# EAGLE board Balloon2_ (EAGLE 7.3.0)
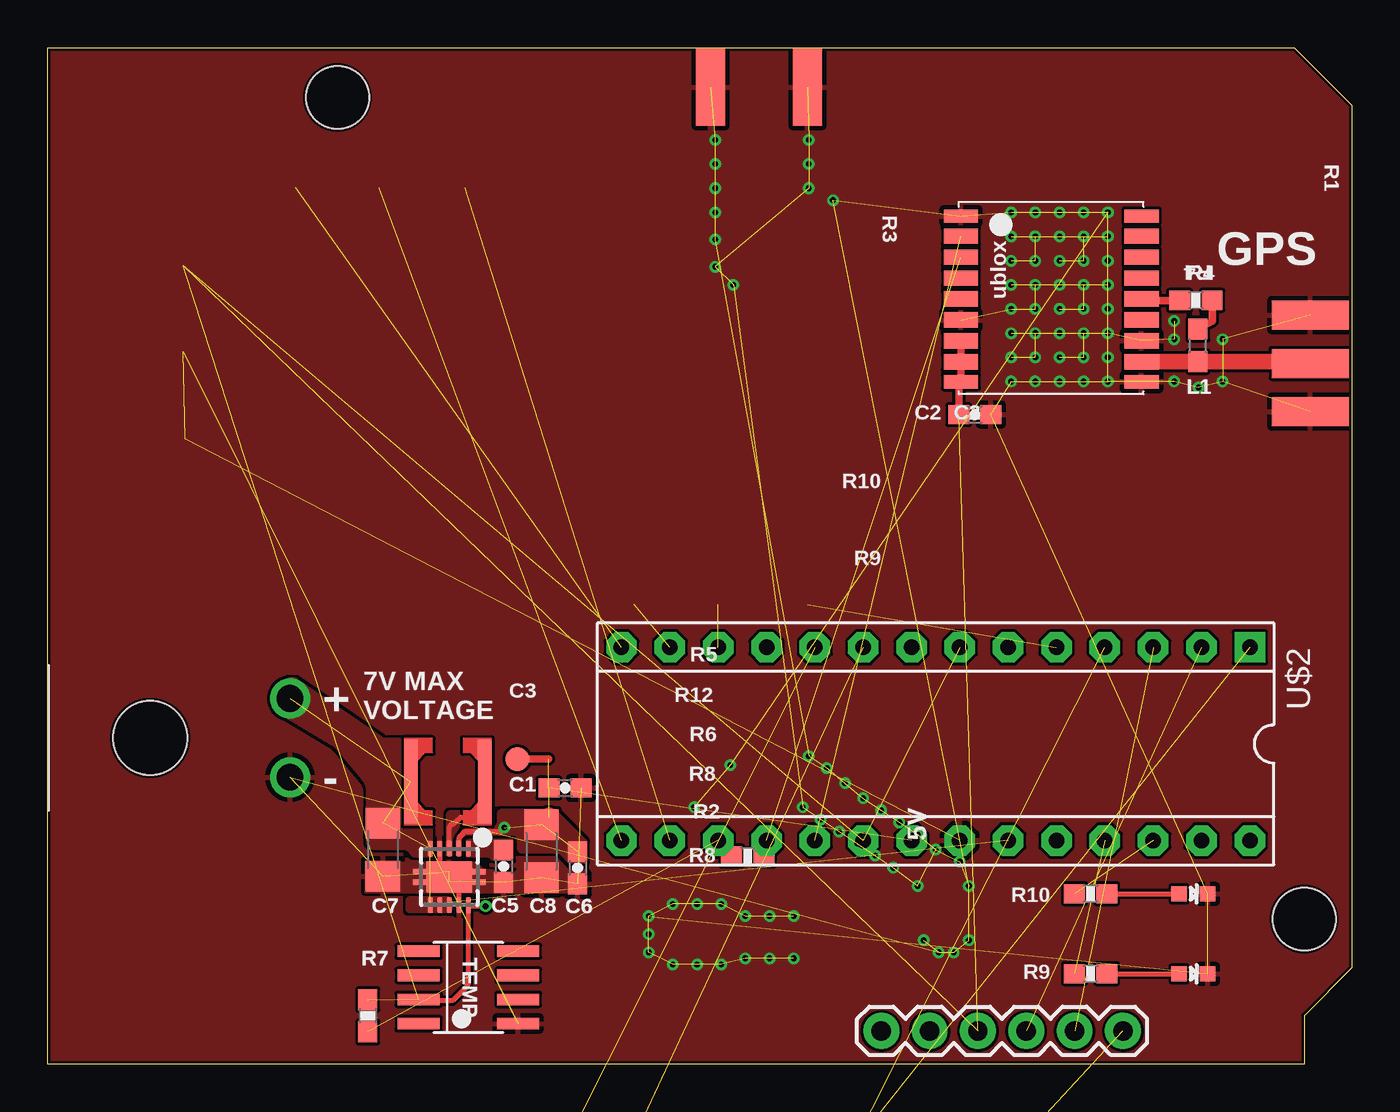
[diagram p0: board, top side]
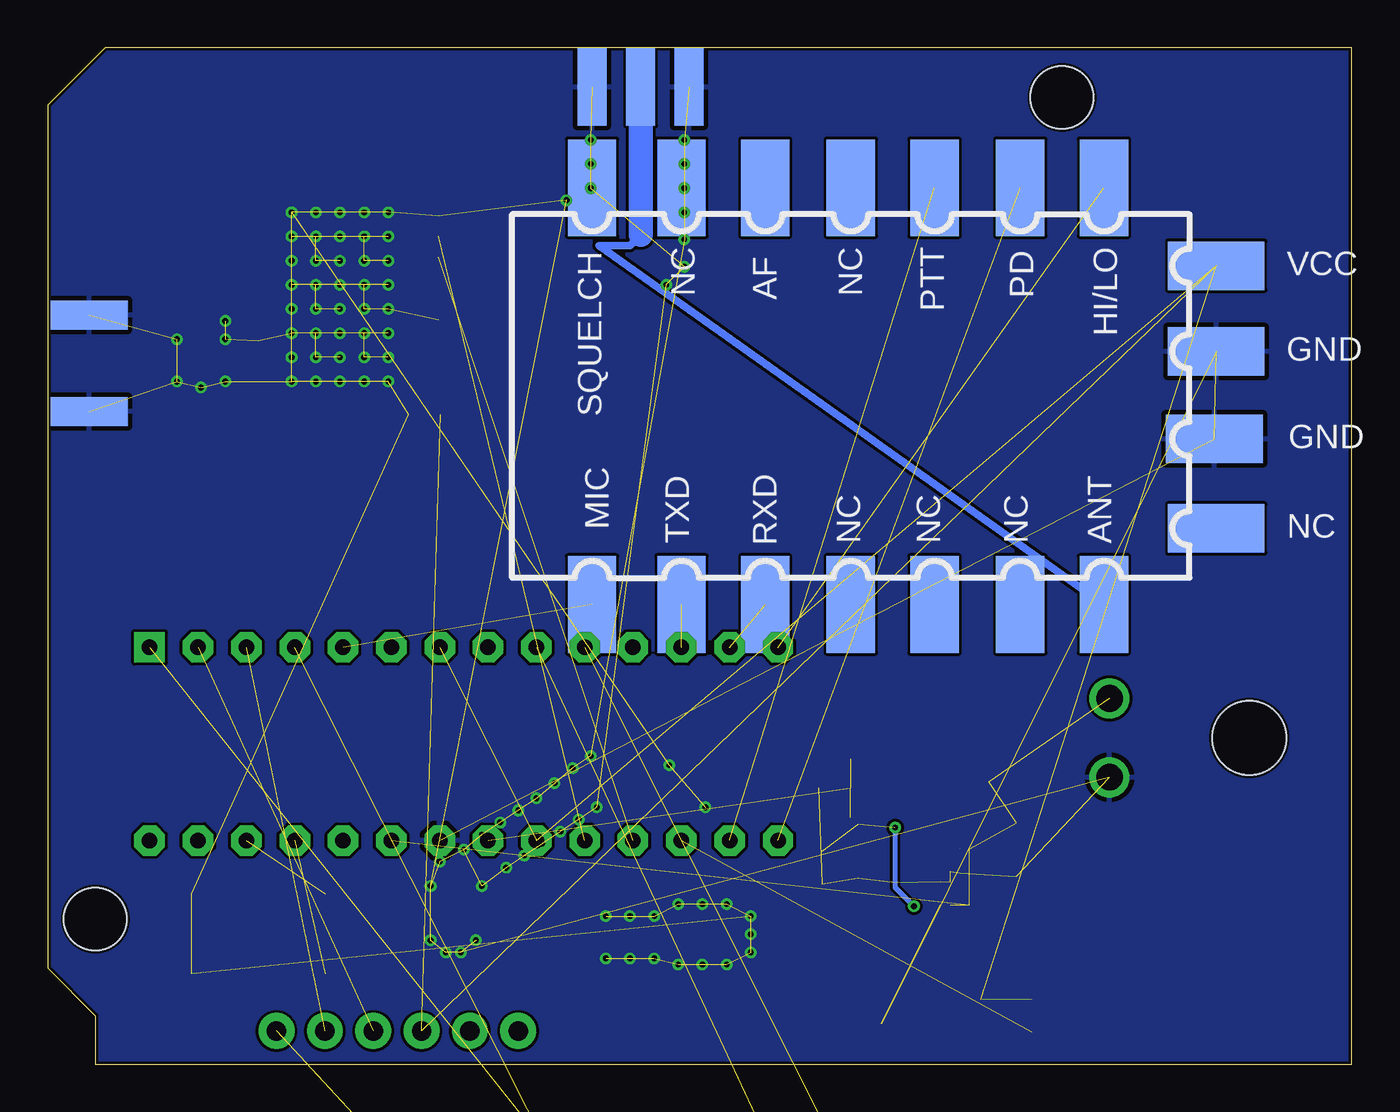
[diagram p1: board, bottom side, seen from below]

Size 68.55 x 53.43 mm. Coordinates in mm from the lower left corner, seen from the top.
Outline: 0,53.43 65.52,53.43 68.55,50.4 68.55,5.05 68.53,5.05 66.04,2.54 66.04,0 0,0 0,53.43
Copper layers (1*16): Top 0.035mm / dielectric 1.5mm / Bottom 0.035mm
Design rules "Hackvana": minimum track width 6mil, minimum drill 0.3mm, track to track 6mil, track to pad 6mil, pad to pad 6mil, via to via 6mil, smd to smd 0mil, copper to edge 6mil, drill to drill 6mil, minimum pad ring 10mil, minimum via ring 6mil, stop-mask expansion 2mil, vias tented up to drill 100mil, thermal gap 10mil
Net classes: 0 default: width 0.203 mm; 1 vcc: width 0.254 mm; 2 gnd: width 0.305 mm, drill 0.508 mm, clearance 0.152 mm
Holes 3.3 mm at 66.04,7.62 15.24,50.8

## Footprints (pad centres in the part's own frame; a part is rotated, then mirrored left to right if it is on the bottom)
0603-CAP = smd 1.1 x 1: 1 -0.85,0; 2 0.85,0
1206 = smd 1.6 x 1.8: 1 -1.4,0; 2 1.4,0
1X06 = drill 1.016 pad 1.88: 1 0,0; 2 2.54,0; 3 5.08,0; 4 7.62,0; 5 10.16,0; 6 12.7,0
S-PDSO-N10 = smd 0.28 x 0.85: 1 -1,-1.475; 2 -0.5,-1.475; 3 0,-1.475; 4 0.5,-1.475; 5 1,-1.475; 6 1,1.475; 7 0.5,1.475; 8 0,1.475; 9 -0.5,1.475; 10 -1,1.475 | smd 2.4 x 1.65: PP 0,0 | smd 3.8 x 0.28: PP@1 0,0.275; PP@2 0,-0.275
SMA-EDGE = smd 1.524 x 4.064: GND@0 -2.54,0; GND@1 2.54,0; SIG 0,0 | smd 1.524 x 4.064 bottom: GND@2 -2.54,0; GND@3 2.54,0
0603 = smd 1.1 x 1: 1 -0.85,0; 2 0.85,0
LED-0603 = smd 0.8 x 0.8: A 0,-0.75; C 0,0.75
COILCRAFT_LPS4018 = smd 0.7 x 4.4: P$1 -1.95,0; P$2 1.95,0
QS = drill 0.61 long: 1 -2.54,0; 2 2.54,0
0603-RES = smd 1.1 x 1: 1 -0.85,0; 2 0.85,0
BUZZER-12MM-NS = drill 0.9: + 3.25,0; - -3.25,0
DS18B20_SOIC = smd 0.61 x 2.21: DQ 1.905,-2.616; GND 1.905,2.616; NC -1.905,-2.616; NC2 -0.635,-2.616; NC3 -1.905,2.616; NC4 -0.635,2.616; NC5 0.635,2.616; VCC 0.635,-2.616
PAD.03X.05 = smd 1.27 x 1.27: P$1 0,0
UBLOX_MAX = smd 1.8 x 0.7: 1_GND 4.95,-4.4; 9_V_RESET 4.95,4.3; 10_GND -4.55,4.3; 18_RESERVED -4.55,-4.4 | smd 1.8 x 0.8: 2_TXD1 4.95,-3.35; 3_RXD1 4.95,-2.25; 4_TIMEPULSE 4.95,-1.15; 5_EXTINT0 4.95,-0.05; 6_V_BCKP 4.95,1.05; 7_VCC_IO 4.95,2.15; 8_VCC 4.95,3.25; 11_RF_IN -4.55,3.25; 12_GND -4.55,2.15; 13_ANTON -4.55,1.05; 14_VCC_RF -4.55,-0.05; 15_RESERVED -4.55,-1.15; 16_SDA2 -4.55,-2.25; 17_SCL2 -4.55,-3.35
DIL28 = drill 0.813 pad 1.6 square: 1 -16.51,-5.08 | drill 0.813 pad 1.6 octagon: 2 -13.97,-5.08; 3 -11.43,-5.08; 4 -8.89,-5.08; 5 -6.35,-5.08; 6 -3.81,-5.08; 7 -1.27,-5.08; 8 1.27,-5.08; 9 3.81,-5.08; 10 6.35,-5.08; 11 8.89,-5.08; 12 11.43,-5.08; 13 13.97,-5.08; 14 16.51,-5.08; 15 16.51,5.08; 16 13.97,5.08; 17 11.43,5.08; 18 8.89,5.08; 19 6.35,5.08; 20 3.81,5.08; 21 1.27,5.08; 22 -1.27,5.08; 23 -3.81,5.08; 24 -6.35,5.08; 25 -8.89,5.08; 26 -11.43,5.08; 27 -13.97,5.08; 28 -16.51,5.08
DORJI = smd 2.54 x 5.08: P$1 4.2,20.5; P$2 8.9,20.5; P$3 13.3,20.5; P$4 17.8,20.5; P$5 22.2,20.5; P$6 26.7,20.5; P$7 31.1,20.5; P$12 31.1,-1.4; P$13 26.7,-1.4; P$14 22.2,-1.4; P$15 17.8,-1.4; P$16 13.3,-1.4; P$17 8.9,-1.4; P$18 4.2,-1.4 | smd 5.08 x 2.54: P$8 37,16.4; P$9 37,11.9; P$10 36.9,7.3; P$11 37,2.6
TE_CONNECTIVITY_1-770966-0 = drill 1.4: P$1 -2.07,7.34; P$2 2.07,7.34 | hole 3.9: 0,0

## Placement (x,y rotation side)
C1  100nF  [0603-CAP]  27.19,14.51 0 top
C2  100n  [0603-CAP]  48.74,34.13 0 top
C4  1u  [0603-CAP]  0.32,-58.26 0 top  (outside the outline)
C5  10µF  [0603-CAP]  23.97,10.4 270 top
C6  0.1µF  [0603-CAP]  27.86,10.32 270 top
C7  10uF  [1206]  17.62,11.27 270 top
C8  22uF  [1206]  25.96,11.19 270 top
C9  22p  [0603-CAP]  0.32,-61.28 0 top  (outside the outline)
C10  22p  [0603-CAP]  0.32,-64.29 0 top  (outside the outline)
FTDI  [1X06]  56.52,1.75 180 top
IC2  TPS61201  [S-PDSO-N10]  21.11,9.84 180 top
J$2  SMA_EDGE  [SMA-EDGE]  66.36,36.83 90 top
J$4  SMA_EDGE  [SMA-EDGE]  37.39,51.36 0 bottom
L1  33µH  [0603]  60.45,37.77 90 top
LED1  Green  [LED-0603]  60.21,4.75 270 top
LED3  Red  [LED-0603]  60.21,8.95 270 top
LPS4018  2.2µH  [COILCRAFT_LPS4018]  21.03,14.84 0 top
Q1  [QS]  4.6,-54.45 0 top  (outside the outline)
R4  10R  [0603-RES]  60.35,40.14 180 top
R7  4K7  [0603-RES]  16.83,2.54 270 top
R8  10k  [0603-RES]  36.8,10.94 0 top
R9  1k  [0603-RES]  54.82,4.75 180 top
R10  1k  [0603-RES]  54.82,8.95 180 top
SG1  BUZZERNS  [BUZZER-12MM-NS]  4.92,-72.07 0 top  (outside the outline)
TEMP  DS1821  [DS18B20_SOIC]  22.11,4.03 270 top
TP1  TEST-POINT3X5  [PAD.03X.05]  24.69,16.03 0 top
U$1  UBLOX_MAX  [UBLOX_MAX]  52.94,40.16 180 top
U$2  ATMEGA328  [DIL28]  46.67,16.83 180 top
U$7  [DORJI]  44.13,25.56 0 bottom
U$9  TE_CONNECTIVITY_1-770966-0  [TE_CONNECTIVITY_1-770966-0]  5.4,17.14 270 top

## Library data of the parts
C1 C2 C4-C10 FTDI J$2 J$4 L1 LED1 LED3 R4 R7-R10 TP1 = SparkFun
IC2 = texas; MPN: TPS61201DRCT; OC_FARNELL: unknown; OC_NEWARK: 37M0068
LPS4018 = StevesCoilCraft; FARNELL: 2287680
Q1 = special
SG1 = SparkFun-Electromechanical
TEMP U$1 = ava
U$2 = ido
U$7 = dorji
U$9 = ava; FARNELL: 1098556

## Nets
A0/VBATT [vcc]: C7.1 IC2.5 IC2.6 IC2.7 IC2.8 LPS4018.P$1 U$2.23 U$9.P$1
BUZZER: SG1.+ U$2.4
D4: U$2.6
GND [vcc]: C1.2 C2.2 C5.2 C6.2 C7.2 C8.2 IC2.4 IC2.9 IC2.PP IC2.PP@1 IC2.PP@2 J$2.GND@0 J$2.GND@1 J$2.GND@2 J$2.GND@3 J$4.GND@0 J$4.GND@1 J$4.GND@2 J$4.GND@3 LED1.C LED3.C TEMP.GND U$1.1_GND U$1.6_V_BCKP U$1.10_GND U$1.12_GND U$2.22 U$7.P$9 U$7.P$10 U$9.P$2
JETTISON: U$2.11
N$1: U$2.5 U$7.P$18
N$2: C4.2 FTDI.1
N$3: C4.1 U$2.1
N$4: J$2.SIG L1.1 U$1.11_RF_IN
N$5: IC2.3 LPS4018.P$2
N$6: J$4.SIG U$7.P$12
N$8: FTDI.6
N$9: FTDI.3 U$2.2
N$10: FTDI.2 U$2.3
N$11: C5.1 IC2.1
N$12: LED1.A R9.1
N$13: LED3.A R10.1
N$14: L1.2 R4.1
N$15: R4.2 U$1.14_VCC_RF
N$16: U$2.8
N$17: C9.1 Q1.2 U$2.9
N$18: C10.1 Q1.1 U$2.10
N$19: C10.2
N$20: U$1.3_RXD1 U$2.18
N$21: U$2.12 U$7.P$17
N$22: U$2.13 U$7.P$16
N$23: U$2.14 U$7.P$7
N$24: U$2.15 U$7.P$6
N$25: U$2.16 U$7.P$5
N$26: R7.2 U$2.17
N$28: C1.1 U$2.21
N$29: U$1.2_TXD1 U$2.19
N$30: R10.2 U$2.26
N$31: R9.2 U$2.25
N$33: SG1.-
SCL: U$2.28
SDA: U$2.27
V5V: C6.1 C8.1 IC2.2 IC2.10 TP1.P$1
VCC: C2.1 FTDI.4 R7.1 TEMP.VCC U$1.7_VCC_IO U$1.8_VCC U$1.9_V_RESET U$2.7 U$2.20 U$7.P$8

## Tracks (layer width: path | path; a pad name or v marks a point on that pad's centre or on a via)
A0/VBATT  (7 unrouted)
  pour Top (no thermals): 19.06,8.81 21.02,8.81 arc-90 21.27,8.56 21.27,8.19 arc-90 21.02,7.94 19.06,7.94 arc-90 18.81,8.19 18.81,8.56 arc-90
  pour Top (no thermals): 15.19,16.54 16.51,14.96 arc-40 16.75,14.32 16.75,11.69 arc45 16.82,11.52 16.99,11.34 arc45 17.17,11.27 18.71,11.27 arc-45 18.89,11.2 19.14,10.95 arc45 19.31,10.87 20.24,10.87 20.24,13.26 20.16,13.34 19.76,13.34 19.37,13.73 19.37,16.03 19.76,16.43 20.24,16.43 20.24,17.14 17.72,17.14 arc-45 17.55,17.22 13.08,20.28 arc34 12.94,20.32 12.7,20.32 11.99,19.92 11.91,18.57 14.94,16.75 arc-19
BUZZER  (1 unrouted)
GND  (via drill 0.3)  (126 unrouted)
  Top 0.254: 20.6,11.31 20.6,10.04 | 21.63,8.37 21.63,9.6
  other vias: 33.97,13.49 35.88,15.72 41.27,45.4 48.42,9.37 45.72,9.37 46.04,6.51 48.42,6.51 47.62,5.87 46.83,5.87 44.45,10.32 47.94,10.64 46.67,11.27 43.5,10.95 45.72,12.06 44.77,12.7 43.81,13.34 42.86,13.97 41.91,14.76 42.55,11.59 41.59,12.22 40.64,12.86 39.69,13.49 36.04,40.96 35.08,41.91 40.01,46.04 40.01,47.31 40.01,48.58 40.96,15.56 40.01,16.19 35.08,43.34 35.08,44.77 35.08,46.04 35.08,47.31 35.08,48.58 39.21,7.78 37.94,7.78 36.67,7.78 35.4,8.41 34.13,8.41 32.86,8.41 31.59,7.78 31.59,5.87 32.86,5.24 34.13,5.24 35.4,5.24 39.21,5.56 37.94,5.56 36.67,5.56 31.59,6.83 55.72,43.5 61.75,38.1 61.75,35.88 59.21,38.1 59.21,39.05 59.21,35.88 60.48,35.56 55.72,35.88 55.72,37.15 55.72,38.42 55.72,39.69 55.72,40.96 55.72,42.23 55.72,44.77 54.45,43.5 54.45,35.88 54.45,37.15 54.45,38.42 54.45,39.69 54.45,40.96 54.45,42.23 54.45,44.77 53.18,43.5 53.18,35.88 53.18,37.15 53.18,38.42 53.18,39.69 53.18,40.96 53.18,42.23 53.18,44.77 51.91,43.5 51.91,35.88 51.91,37.15 51.91,38.42 51.91,39.69 51.91,40.96 51.91,42.23 51.91,44.77 50.64,43.5 50.64,35.88 50.64,37.15 50.64,38.42 50.64,39.69 50.64,40.96 50.64,42.23 50.64,44.77
  pour Top (no thermals): 28.34,10.24 27.38,10.24 26.82,10.8 arc45 26.65,10.91 24.94,10.91 arc90 24.69,10.62 24.69,10.33 arc-90 24.44,10.08 23.2,10.08 arc-45 23.02,10.15 22.54,10.64 20.08,10.64 20,10.56 20,9.05 19.92,8.97 28.34,8.97
  pour Top (no thermals): 16.67,10.64 20,10.64 20,8.97 16.67,8.97
  pour Top (rank 2): 0,53.43 65.52,53.43 68.55,50.4 68.58,5.08 66.04,2.54 66.04,0 0,0
  pour Bottom: 0,53.43 65.52,53.43 68.55,50.4 68.58,5.08 66.04,2.54 66.04,0 0,0
N$1  (1 unrouted)
N$2  (1 unrouted)
N$3  (1 unrouted)
N$4
  Top 0.254: L1.1 61.08,36.91
  Top 0.813: U$1.11_RF_IN 61.08,36.91 | L1.1 66.26,36.92 J$2.SIG
N$5
  Top 0.254: IC2.3 21.11,12.4 arc-45 21.19,12.57 21.23,12.62 21.25,12.62 arc45 21.43,12.69 21.71,12.98 22.64,12.98 arc45 22.81,13.05 22.98,13.22 LPS4018.P$2 arc-45 LPS4018.P$2
  pour Top (no thermals): 21.27,10.95 20.95,10.95 20.95,13.09 arc-90 21.2,13.34 22.23,13.34 22.23,12.54 21.85,12.54 arc59 21.64,12.42 21.27,11.83
N$6
  Bottom 0.406: 37.39,43.58 37.94,43.02 39.57,43.02 U$7.P$12
  Bottom 1.27: J$4.SIG 37.39,43.58
N$9  (1 unrouted)
N$10  (1 unrouted)
N$11
  pour Top (no thermals): 21.99,10.87 23.07,10.87 arc-45 23.25,10.8 23.34,10.72 24.45,10.72 24.45,11.83 22.17,11.83 arc45 21.99,11.75 arc45 21.99,11.74
N$12
  Top 0.254: 59.16,4.96 LED1.A R9.1
N$13
  Top 0.254: 59.16,9.17 LED3.A R10.1
N$14
  Top 0.406: R4.1 61.2,39.05 L1.2
N$15
  Top 0.406: R4.2 57.57,40.14 U$1.14_VCC_RF
N$17  (2 unrouted)
N$18  (2 unrouted)
N$20  (1 unrouted)
N$21  (1 unrouted)
N$22  (1 unrouted)
N$23  (1 unrouted)
N$24  (1 unrouted)
N$25  (1 unrouted)
N$26  (1 unrouted)
N$28  (1 unrouted)
N$29  (1 unrouted)
N$30  (1 unrouted)
N$31  (1 unrouted)
V5V  (via drill 0.3)  (3 unrouted)
  Top 0.254: IC2.2 21.61,11.79 arc-45 21.69,11.96 21.95,12.22 23.83,12.22 arc45 24,12.3 v24.01,12.42 | v23.02,8.29 22.11,8.29 | 22.11,8.29 IC2.10 | 22.11,8.29 22.11,4.27 arc-45 22.03,4.09 21.27,3.33 19.65,3.33
  Top 0.406: TP1.P$1 26.34,16.03
  Top 1.016: 26.34,12.98 C8.1
  Bottom 0.254: v24.01,12.42 24.01,9.29 v23.02,8.29
  pour Top (no thermals): 21.47,10.95 21.47,11.75 arc-33 21.51,11.89 21.75,12.27 arc-57 21.96,12.38 23.3,12.38 arc50 23.49,12.47 23.56,12.55 arc40 23.61,12.71 23.61,13.14 arc-51 23.71,13.33 23.74,13.36 arc-39 23.9,13.41 26.67,13.41 28.34,11.75 28.34,10.56 27.38,10.56 26.9,11.04 arc45 26.73,11.07 24.94,11.07 arc-90 24.69,11.36 24.69,11.78 arc90 24.44,12.03 22.06,12.03 arc50 21.87,11.94 21.75,11.79 21.75,10.95
VCC  (6 unrouted)
  Top 0.406: U$1.7_VCC_IO U$1.8_VCC U$1.9_V_RESET 47.89,35.76 C2.1

## Text on the board
tPlace: GPS | + | 7V MAX / VOLTAGE | - | 5V
tDocu: Released under the Creative Commons Attribution Share-Alike 3.0 License | http://creativecommons.org/licenses/by-sa/3.0
_tNames: R1 | R3 | R4 | L1 | C2 | R10 | R9 | R5 | C3 | R12 | R6 | R8 | C1 | R2 | C7 | C5 | C8 | C6 | TEMP | R7